# Altium PCB Lens-Maker.PcbDoc
Units mil, origin at the board's own origin, x right, y up, seen from the top; angles counter-clockwise.
Board outline 3937.01 x 1968.5 mil, 6 copper layers (L1-TOP-SGN-GND, L2-GND, L3-SGN-GND, Layer 1, Layer 2, Bottom Layer), stack 60.748 mil thick; 110 components, 94 nets, 427 pads, 16 vias.
Unrouted connection lines stored in the file: 291.
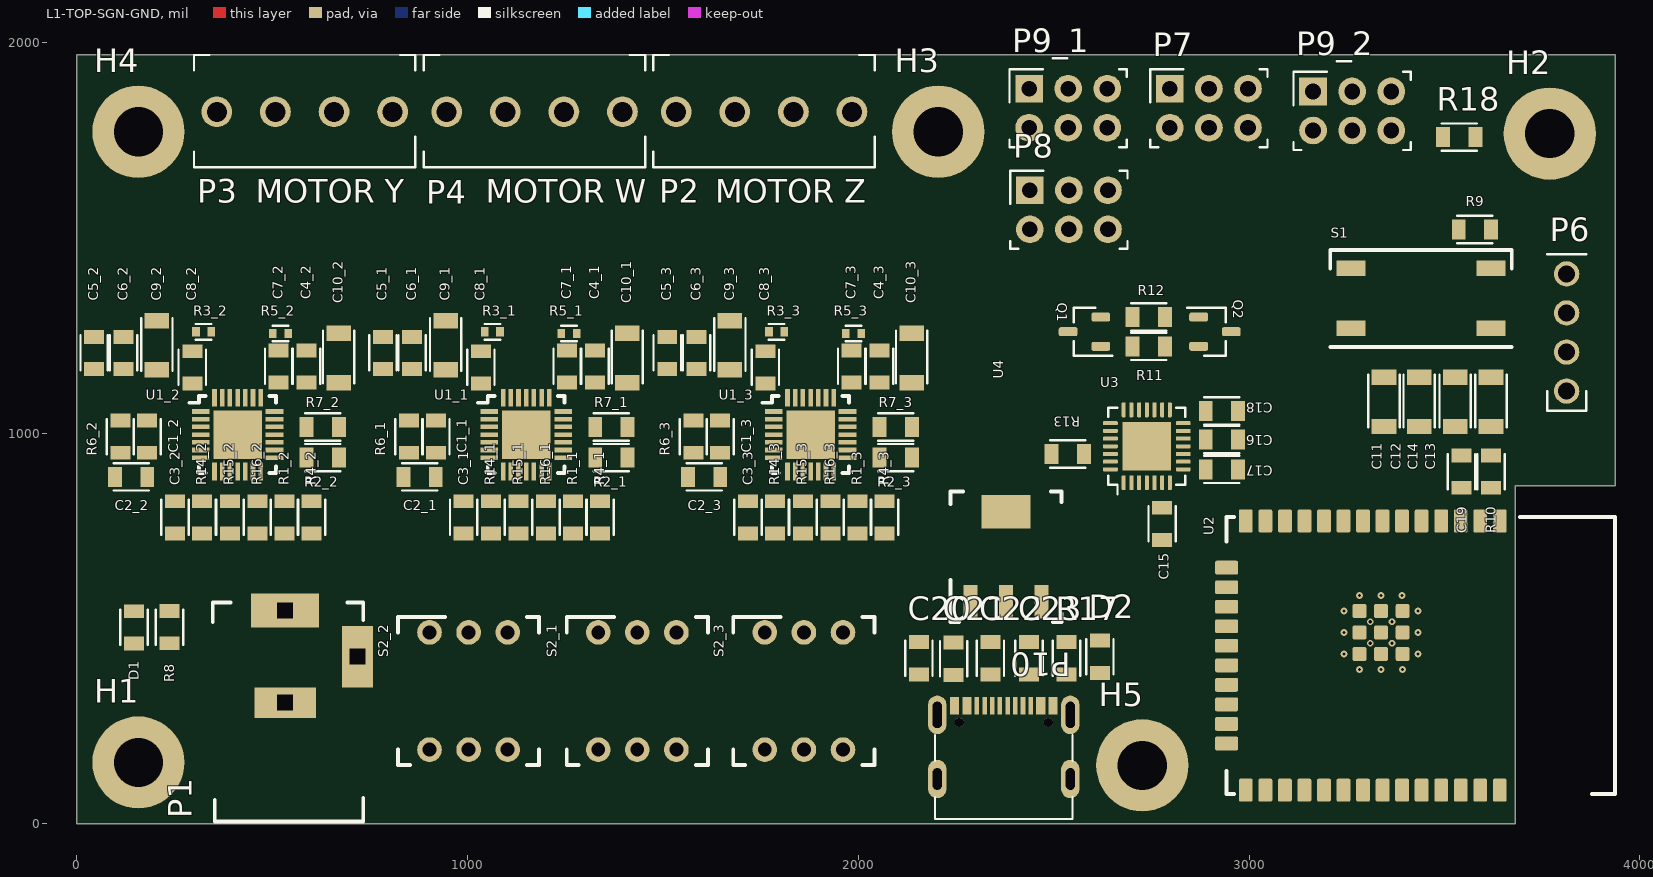
[diagram p0: L1-TOP-SGN-GND view]
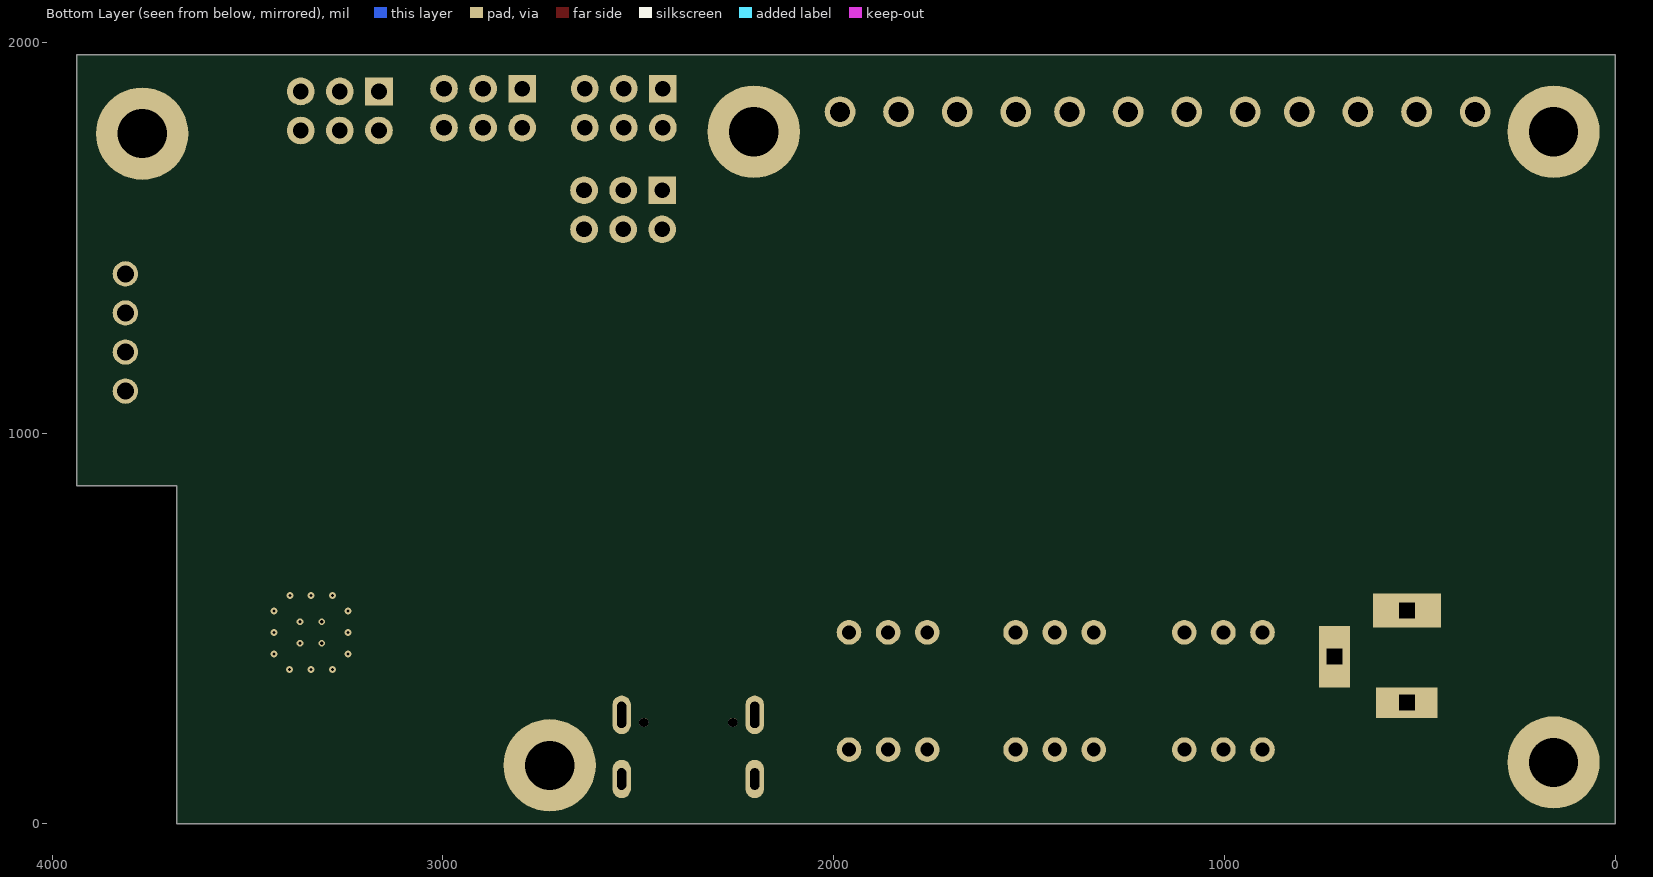
[diagram p1: Bottom Layer view, seen from below]

## Layer stack, top to bottom
Top Solder: solder mask 0.8, Solder Resist, Dk 3.8
L1-TOP-SGN-GND: signal copper 1.378
Dielectric 1: prepreg 3.913, Prepreg 3313x1, Dk 4.05
L2-GND: signal copper 0.689
Dielectric 2: core 21.654, Core, Dk 4.6
L3-SGN-GND: signal copper 0.598
Dielectric 3: prepreg 4.284, Prepreg 2116x1, Dk 4.25
Layer 1: signal copper 0.598
Dielectric 4: core 21.654, Core, Dk 4.6
Layer 2: signal copper 0.689
Dielectric 5: prepreg 3.913, Prepreg 3313x1, Dk 4.05
Bottom Layer: signal copper 1.378
Board Layer Stack Bottom Solder: solder mask 0.8, Solder Resist, Dk 3.8

## Board outline
0,0 3681.1,0 3681.1,866.14 3937.01,866.14 3937.01,1968.5 0,1968.5

## Design rules (kind name [scope] priority, off if disabled: settings)
Clearance Clearance_Tracks [IsTrack vs IsTrack] p1: gap=3.54 ignorepadtopadclearanceinfootprint=FALSE
Clearance PadToTrack_Clearance [IsPad vs IsTrack] p2: gap=7.87 ignorepadtopadclearanceinfootprint=FALSE
Clearance ViaToTrack_Clearance [IsVia vs IsTrack] p3: gap=10 ignorepadtopadclearanceinfootprint=FALSE
Clearance PadToPad_Clearance [IsPad] p4: gap=5 ignorepadtopadclearanceinfootprint=FALSE
Clearance ViaToVia_Clearance [IsVia] p5: gap=10 ignorepadtopadclearanceinfootprint=FALSE
Clearance Clearance_General [All] p6: gap=10 ignorepadtopadclearanceinfootprint=FALSE
DiffPairsRouting DiffPairsRouting_USB [InDifferentialPairClass('USBDIFF')] p1: maxlimit=10 minlimit=6 mostfreqgap=10 toplayer_maxgap=6 toplayer_prefgap=6 toplayer_minwidth=6 toplayer_maxwidth=6 toplayer_prefwidth=6 bottomlayer_maxgap=6 bottomlayer_prefgap=6 bottomlayer_minwidth=6 bottomlayer_maxwidth=6 bottomlayer_prefwidth=6 impedanceprofiledriven=TRUE impedanceprofileid={743CC166-8A05-4D0D-BD32-40FB75AD64E1} impedanceprofilevalue=90.000000 maxuncoupledlength=500
HoleSize [All] p1: absolutevalues=TRUE maxlimit=248.03 minlimit=7.87 maxpercent=80.000 minpercent=20.000
HoleToHoleClearance [All] p1: gap=19.68 allowstackedmicrovias=TRUE
MinimumAnnularRing [All] p1: minimumring=7.87
PolygonConnect PolygonConnect_THT [All] p1: thpad.connectstyle=Relief thpad.reliefconductorwidth=10 thpad.reliefentries=4 thpad.polygonreliefangle="45 Angle" thpad.airgapwidth=12 smdpad.connectstyle=Direct smdpad.reliefconductorwidth=10 smdpad.reliefentries=4 smdpad.polygonreliefangle="45 Angle" smdpad.airgapwidth=12 via.connectstyle=Direct via.reliefconductorwidth=10 via.reliefentries=4 via.polygonreliefangle="45 Angle" via.airgapwidth=12
RoutingVias [All] p1: holewidth=11.81 width=17.72 viastyle="Through Hole" minholewidth=11.81 minwidth=15.75 maxholewidth=11.81 maxwidth=17.72
SilkToSolderMaskClearance [IsPad] p1: minsilkscreentomaskgap=5.91 clearancetoexposedcopper=TRUE
SolderMaskExpansion [All] p1: expansion=4 istentingtop=FALSE
UnRoutedNet [All] p1: checkbadconnections=TRUE
Width [All] p1: maxlimit=40 minlimit=3.54 preferedwidth=10 toplayer_maxwidth=39.37 bottomlayer_maxwidth=39.37 minimp=50.000000 maximp=50.000000 favimp=50.000000
25 further rules are at their usual default settings.

## Classes and differential pairs
component class U_Mechanical_Holes: H1 H2 H3 H4 H5 R18
differential pair class USBDIFF: D
channel class GPIO_Header: U_GPIO_Header1 U_GPIO_Header2
channel class A4988: U_A49881 U_A49882 U_A49883
component class U_USB_Connector: P10
component class U_Stepper_Driver: D1 P1 P2 P3 P4 R8
component class U_SPI_Header: P7
component class U_Power: C20 C21 C22 C23 D2 R17 U4
component class U_I2C_Header: P8
component class U_GPIO_Header2: P9_2
component class U_GPIO_Header1: P9_1
component class U_ESP32_Block: C11 C12 C13 C14 C15 C16 C17 C18 C19 P6 Q1 Q2 R9 R10 R11 R12 R13 S1 tga U2 U3
component class U_A49883: C1_3 C2_3 C3_3 C4_3 C5_3 C6_3 C7_3 C8_3 C9_3 C10_3 R1_3 R2_3 R3_3 R4_3 R5_3 R6_3 R7_3 R14_3 R15_3 R16_3 S2_3 U1_3
component class U_A49882: C1_2 C2_2 C3_2 C4_2 C5_2 C6_2 C7_2 C8_2 C9_2 C10_2 R1_2 R2_2 R3_2 R4_2 R5_2 R6_2 R7_2 R14_2 R15_2 R16_2 S2_2 U1_2
component class U_A49881: C1_1 C2_1 C3_1 C4_1 C5_1 C6_1 C7_1 C8_1 C9_1 C10_1 R1_1 R2_1 R3_1 R4_1 R5_1 R6_1 R7_1 R14_1 R15_1 R16_1 S2_1 U1_1
differential pair D: +D_P -D_N

## Components (designator, comment, footprint, x,y, rotation, side; value= is the part's Value field where it differs from the comment)
C1_1 "CAP" 0805 918.62,991.49 r90 top value=100nF (schematic designator C1)
C1_2 "CAP" 0805 179.9,991.49 r90 top value=100nF (schematic designator C1)
C1_3 "CAP" 0805 1646.48,991.49 r90 top value=100nF (schematic designator C1)
C2_1 "CAP" 0805 877.29,888.49 r0 top value=100nF (schematic designator C2)
C2_2 "CAP" 0805 138.56,888.49 r0 top value=100nF (schematic designator C2)
C2_3 "CAP" 0805 1605.14,888.49 r0 top value=100nF (schematic designator C2)
C3_1 "CAP" 0805 989.99,784.74 r90 top value=220nF (schematic designator C3)
C3_2 "CAP" 0805 251.27,784.74 r90 top value=220nF (schematic designator C3)
C3_3 "CAP" 0805 1717.85,784.74 r90 top value=220nF (schematic designator C3)
C4_1 "CAP" 0805 1326.62,1171 r270 top value=100nF (schematic designator C4)
C4_2 "CAP" 0805 587.9,1171 r270 top value=100nF (schematic designator C4)
C4_3 "CAP" 0805 2054.48,1171 r270 top value=100nF (schematic designator C4)
C5_1 "CAP" 0805 783.15,1205.54 r270 top value=100nF (schematic designator C5)
C5_2 "CAP" 0805 44.43,1205.54 r270 top value=100nF (schematic designator C5)
C5_3 "CAP" 0805 1511.01,1205.54 r270 top value=100nF (schematic designator C5)
C6_1 "CAP" 0805 858.15,1205.54 r90 top value=4.7uF (schematic designator C6)
C6_2 "CAP" 0805 119.43,1205.54 r90 top value=4.7uF (schematic designator C6)
C6_3 "CAP" 0805 1586.01,1205.54 r90 top value=4.7uF (schematic designator C6)
C7_1 "CAP" 0805 1254.99,1171 r90 top value=4.7uF (schematic designator C7)
C7_2 "CAP" 0805 516.27,1171 r90 top value=4.7uF (schematic designator C7)
C7_3 "CAP" 0805 1982.85,1171 r90 top value=4.7uF (schematic designator C7)
C8_1 "CAP" 0805 1033.99,1168.83 r90 top value=47uF (schematic designator C8)
C8_2 "CAP" 0805 295.27,1168.83 r90 top value=47uF (schematic designator C8)
C8_3 "CAP" 0805 1761.85,1168.83 r90 top value=47uF (schematic designator C8)
C9_1 "CAP" 1206 943.61,1225.16 r90 top value=47uF (schematic designator C9)
C9_2 "CAP" 1206 204.88,1225.16 r90 top value=47uF (schematic designator C9)
C9_3 "CAP" 1206 1671.46,1225.16 r90 top value=47uF (schematic designator C9)
C10_1 "CAP" 1206 1408.62,1192.65 r90 top value=47uF (schematic designator C10)
C10_2 "CAP" 1206 669.9,1192.65 r90 top value=47uF (schematic designator C10)
C10_3 "CAP" 1206 2136.48,1192.65 r90 top value=47uF (schematic designator C10)
C11 "CAP" 1206 3345.37,1080.3 r90 top value=47uF
C12 "CAP" 1206 3435.37,1080.3 r90 top value=47uF
C13 "CAP" 1206 3527.37,1080.3 r90 top value=47uF
C14 "CAP" 1206 3619.37,1080.3 r90 top value=47uF
C15 "CAP" 0805 2777.74,768.11 r90 top value=1uF
C16 "CAP" 0805 2930.79,983.7 r180 top value=100nF
C17 "CAP" 0805 2930.79,907.72 r0 top value=4.7uF
C18 "CAP" 0805 2930.79,1057.32 r0 top value=4.7uF
C19 "CAP" 0805 3543.55,901.77 r90 top value=1uF
C20 "CAP" 0805 2155,424.34 r90 top value=4.7uF
C21 "CAP" 0805 2244,423 r90 top value=4.7uF
C22 "CAP" 0805 2338,424.34 r90 top value=4.7uF
C23 "CAP" 0805 2437,424.34 r90 top value=4.7uF
D1 "LED" 0805 146,503 r270 top
D2 "LED" 0805 2618,428 r270 top
H1 "HOLE" HOLE_M3 157.48,157.48 r0 top
H2 "HOLE" HOLE_M3 3770,1767 r0 top
H3 "HOLE" HOLE_M3 2204.72,1771.65 r0 top
H4 "HOLE" HOLE_M3 157.48,1771.65 r0 top
H5 "HOLE" HOLE_M3 2727,150 r0 top
P1 "DC-005 2.0" "DC-005 2.0" 532.84,546.74 r90 top
P2 "MOTOR Z" WJ124-3.81-4P 1983.84,1822.69 r180 top
P3 "MOTOR Y" WJ124-3.81-4P 808.09,1822.69 r180 top
P4 "MOTOR W" WJ124-3.81-4P 1396.43,1822.69 r180 top
P6 "PZ254V-11-04P" PZ254V-11-04P 3813,1258 r90 top
P7 "HEADER 6POS" "HEADER 3X2" 2797.42,1782 r0 top
P8 "HEADER 6POS" "HEADER 3X2" 2439,1522 r0 top
P9_1 "HEADER 6POS" "HEADER 3X2" 2437.14,1782 r0 top (schematic designator P9)
P9_2 "HEADER 6POS" "HEADER 3X2" 3164,1775 r0 top (schematic designator P9)
P10 "TYPE-C-31-M-12" TYPE-C-31-M-12 2372.35,208.71 r0 top
Q1 "S8050" SOT-23-3 2578.87,1263.94 r270 top
Q2 "S8050" SOT-23-3 2912.87,1256.07 r90 top
R1_1 "RES" 0805 1270.05,784.74 r90 top value=10K (schematic designator R1)
R1_2 "RES" 0805 531.32,784.74 r90 top value=10K (schematic designator R1)
R1_3 "RES" 0805 1997.91,784.74 r90 top value=10K (schematic designator R1)
R2_1 "RES" 0805 1367.96,937.49 r180 top value=0R (schematic designator R2)
R2_2 "RES" 0805 629.24,937.49 r180 top value=0R (schematic designator R2)
R2_3 "RES" 0805 2095.82,937.49 r180 top value=0R (schematic designator R2)
R3_1 "RES" 0402 1063.31,1259.66 r0 top value=50m (schematic designator R3)
R3_2 "RES" 0402 324.58,1259.66 r0 top value=50m (schematic designator R3)
R3_3 "RES" 0402 1791.17,1259.66 r0 top value=50m (schematic designator R3)
R4_1 "RES" 0805 1339.05,784.74 r90 top value=100K (schematic designator R4)
R4_2 "RES" 0805 600.32,784.74 r90 top value=100K (schematic designator R4)
R4_3 "RES" 0805 2066.91,784.74 r90 top value=100K (schematic designator R4)
R5_1 "RES" 0402 1259.68,1255.64 r180 top value=50m (schematic designator R5)
R5_2 "RES" 0402 520.95,1255.64 r180 top value=50m (schematic designator R5)
R5_3 "RES" 0402 1987.54,1255.64 r180 top value=50m (schematic designator R5)
R6_1 "RES" 0805 849.99,991.49 r270 top value=100K (schematic designator R6)
R6_2 "RES" 0805 111.27,991.49 r270 top value=100K (schematic designator R6)
R6_3 "RES" 0805 1577.85,991.49 r270 top value=100K (schematic designator R6)
R7_1 "RES" 0805 1367.96,1016.34 r0 top value=100K (schematic designator R7)
R7_2 "RES" 0805 629.24,1016.34 r0 top value=100K (schematic designator R7)
R7_3 "RES" 0805 2095.82,1016.34 r0 top value=100K (schematic designator R7)
R8 "RES" 0805 237,504 r270 top value=1K6
R9 "RES" 0805 3578.03,1521.36 r0 top value=12K
R10 "RES" 0805 3619.37,901.77 r90 top value=0R
R11 "RES" 0805 2743.26,1222.6 r180 top value=12K
R12 "RES" 0805 2743.26,1297.41 r0 top value=12K
R13 "RES" 0805 2535.96,947.09 r0 top value=470R
R14_1 "RES" 0805 1059.31,784.74 r90 top value=10K (schematic designator R14)
R14_2 "RES" 0805 320.58,784.74 r90 top value=10K (schematic designator R14)
R14_3 "RES" 0805 1787.17,784.74 r90 top value=10K (schematic designator R14)
R15_1 "RES" 0805 1130.31,784.74 r90 top value=10K (schematic designator R15)
R15_2 "RES" 0805 391.58,784.74 r90 top value=10K (schematic designator R15)
R15_3 "RES" 0805 1858.17,784.74 r90 top value=10K (schematic designator R15)
R16_1 "RES" 0805 1200.68,784.74 r90 top value=10K (schematic designator R16)
R16_2 "RES" 0805 461.95,784.74 r90 top value=10K (schematic designator R16)
R16_3 "RES" 0805 1928.54,784.74 r90 top value=10K (schematic designator R16)
R17 "RES" 0805 2533,424.34 r270 top value=330R
R18 "RES" 0805 3538,1758 r180 top value=5.1M
S1 "PUSHBUTTON" PUSHBUTTON 3440.24,1345.36 r0 top
S2_1 "DIP SWITCH 3POS" C99420 1434.4,340.34 r0 top (schematic designator S2)
S2_2 "DIP SWITCH 3POS" C99420 1002.51,340.34 r0 top (schematic designator S2)
S2_3 "DIP SWITCH 3POS" C99420 1860.74,340.34 r0 top (schematic designator S2)
U1_1 "A4988" 28-QFN 1149.99,996.66 r0 top (schematic designator U1)
U1_2 "A4988" 28-QFN 411.27,996.66 r0 top (schematic designator U1)
U1_3 "A4988" 28-QFN 1877.85,996.66 r0 top (schematic designator U1)
U2 "ESP32-WROOM-32E" ESP32-WROOM-32E 3292.21,431.06 r270 top
U3 "CP2102" CP2102N 2738.37,966.77 r90 top
U4 "AMS1117-3.3V" SOT230P700X180-4N 2378,684 r90 top

## Footprints (in the part's own frame and the unit in brackets; to place one, negate y for a bottom-side part, rotate by r counter-clockwise, add the part's x,y. Pads: shape width x height; smd on the part's side, far side on the other; paste and mask are expansions set on the pad)
28-QFN [mm]
  rect 1.15x0.3 smd mask+0.2: 1(-2.4,1.5) 2(-2.4,1) 3(-2.4,0.5) 4(-2.4,0) 5(-2.4,-0.5) 6(-2.4,-1) 7(-2.4,-1.5) 15(2.4,-1.5) 16(2.4,-1) 17(2.4,-0.5) 18(2.4,0) 19(2.4,0.5) 20(2.4,1) 21(2.4,1.5)
  rect 0.3x1.15 smd mask+0.2: 8(-1.5,-2.4) 9(-1,-2.4) 10(-0.5,-2.4) 11(0,-2.4) 12(0.5,-2.4) 13(1,-2.4) 14(1.5,-2.4) 22(1.5,2.4) 23(1,2.4) 24(0.5,2.4) 25(0,2.4) 26(-0.5,2.4) 27(-1,2.4) 28(-1.5,2.4)
  rect 3.15x3.15 smd mask+0.2: 29(0,0)
  silkscreen extent -3.14,-2.5 2.5,2.5, body extent -2.5,-2.5 2.5,2.5, height 0.87
0402 [mm]
  rect 0.5x0.6 smd: 1(-0.5,0) 2(0.5,0)
  silkscreen extent -0.51,-0.51 0.51,0.51, body extent -0.5,-0.25 0.5,0.25, height 0.4
0805 [mm]
  rect 0.9x1.3 smd: 1(-1.05,0) 2(1.05,0)
  silkscreen extent -1.14,-0.89 1.14,0.89, body extent -1,-0.63 1,0.63, height 0.58
1206 [mm]
  rect 1x1.6 smd: 1(-1.6,0) 2(1.6,0)
  silkscreen extent -1.65,-1.02 1.78,1.02, body extent -1.52,-0.8 1.52,0.8, height 0.56
C99420 [mm]
  round 1.6 hole 0.9: 1(-2.54,3.81) 2(0,3.81) 3(2.54,3.81) 4(-2.54,-3.81) 5(0,-3.81) 6(2.54,-3.81)
  silkscreen extent -4.59,-4.81 4.59,4.81, body extent -4.59,-4.81 4.59,4.81, height 5.3
CP2102N [mm]
  rrect50% 0.97x0.26 smd: 1(-2.37,1.5) 2(-2.37,1) 3(-2.37,0.5) 4(-2.37,0) 5(-2.37,-0.5) 6(-2.37,-1) 7(-2.37,-1.5) 15(2.37,-1.5) 16(2.37,-1) 17(2.37,-0.5) 18(2.37,0) 19(2.37,0.5) 20(2.37,1) 21(2.37,1.5)
  rrect50% 0.26x0.97 smd: 8(-1.5,-2.37) 9(-1,-2.37) 10(-0.5,-2.37) 11(0,-2.37) 12(0.5,-2.37) 13(1,-2.37) 14(1.5,-2.37) 22(1.5,2.37) 23(1,2.37) 24(0.5,2.37) 25(0,2.37) 26(-0.5,2.37) 27(-1,2.37) 28(-1.5,2.37)
  rect 3.15x3.15 smd paste-0.585: 29(0,0)
  silkscreen extent -3.11,-2.5 2.5,2.5, body extent -2.5,-2.5 2.5,2.5, height 1
"DC-005 2.0" [mm]
  rect 4x2 hole 1 square: 2(-3,-4.7)
  rect 2x4 hole 1 square: 3(-6,0)
  rect 2.2x4.4 hole 1 square: 4(0,0)
  silkscreen extent -13.72,-5.08 0.51,4.7, body extent -13.62,-4.9 0.38,4.5, height 11.01
ESP32-WROOM-32E [mm]
  rrect25% 1.5x0.9 smd: 1(-8.75,8.88) 2(-8.75,7.61) 3(-8.75,6.34) 4(-8.75,5.07) 5(-8.75,3.8) 6(-8.75,2.53) 7(-8.75,1.26) 8(-8.75,-0.01) 9(-8.75,-1.28) 10(-8.75,-2.55) 11(-8.75,-3.82) 12(-8.75,-5.09) 13(-8.75,-6.36) 14(-8.75,-7.63) 25(8.75,-7.63) 26(8.75,-6.36) 27(8.75,-5.09) 28(8.75,-3.82) 29(8.75,-2.55) 30(8.75,-1.28) 31(8.75,-0.01) 32(8.75,1.26) 33(8.75,2.53) 34(8.75,3.8) 35(8.75,5.07) 36(8.75,6.34) 37(8.75,7.61) 38(8.75,8.88)
  rrect25% 0.9x1.5 smd: 15(-5.715,-8.88) 16(-4.445,-8.88) 17(-3.175,-8.88) 18(-1.905,-8.88) 19(-0.635,-8.88) 20(0.635,-8.88) 21(1.905,-8.88) 22(3.175,-8.88) 23(4.445,-8.88) 24(5.715,-8.88)
  rrect25% 0.9x0.9 smd: 39(-2.9,1.16) 39(-2.9,2.56) 39(-2.9,-0.24) 39(-1.5,2.56) 39(-1.5,1.16) 39(-1.5,-0.24) 39(-0.1,2.56) 39(-0.1,1.16) 39(-0.1,-0.24)
  silkscreen extent -9,-8.88 9,16.37, body extent -9,-9.13 9,16.37, height 3.2
"HEADER 3X2" [mm]
  rect 1.8x1.8 hole 1.02: 1(0,2.54)
  round 1.8 hole 1.02: 2(0,0) 3(2.54,2.54) 4(2.54,0) 5(5.08,2.54) 6(5.08,0)
  silkscreen extent -1.27,-1.27 6.35,3.81, body extent -1.27,-1.14 6.35,3.68, height 8.38
HOLE_M3 [mm]
  round 6 hole 3.2: 1(0,0)
PUSHBUTTON [mm]
  rect 1.9x1 smd: 1(-4.55,1.95) 1(4.55,1.95) 2(-4.55,-1.95) 2(4.55,-1.95)
  silkscreen extent -5.9,-3.15 5.9,3.15, body extent -5,-3 5,3, height 5.1
PZ254V-11-04P [mm]
  round 1.65 hole 1.1: 1(-3.81,0) 2(-1.27,0) 3(1.27,0) 4(3.81,0)
  silkscreen extent -5.08,-1.27 5.08,1.27, body extent -5.08,-1.27 5.08,1.27, height 7.27
SOT230P700X180-4N [mm] "SOT223, 4-Leads, Body 6.50x7.00mm (avg), Pitch 2.30mm, IPC Medium Density"
  rect 2.15x0.9 smd: 1(-2.925,2.3) 2(-2.925,0) 3(-2.925,-2.3)
  rect 2.15x3.2 smd: 4(2.925,0)
  silkscreen extent -4.25,-3.6 4.25,3.6, body extent -1.85,-3.35 1.85,3.35, height 1.8
SOT-23-3 [mm]
  rrect50% 0.59x1.23 smd: 1(1.05,1.06) 2(-0.85,1.06) 3(0.1,-1.06)
  silkscreen extent -1.46,-0.7 1.66,1.8, body extent -1.36,-1.17 1.56,1.17, height 1.12
TYPE-C-31-M-12 [mm]
  rect 0.6x1.14 smd mask+0.05: A1/B12(-3.2,2.375) A4/B9(-2.4,2.375) B1/A12(3.2,2.375) B4/A9(2.4,2.375)
  rect 0.3x1.14 smd mask+0.05: A5(-1.25,2.375) A6(-0.25,2.375) A7(0.25,2.375) A8(1.25,2.375) B5(1.75,2.375) B6(0.75,2.375) B7(-0.75,2.375) B8(-1.75,2.375)
  oval 1.2x2.5 hole 0.6 slot 1.7 at 90 deg mask+0: S1(-4.325,1.795) S2(4.325,1.795)
  oval 1.2x2.5 hole 0.6 slot 1.4 at 90 deg mask+0: S3(-4.325,-2.375) S4(4.325,-2.375)
  round 0.6 hole 0.6 unplated: ""(-2.89,1.305) ""(2.89,1.305)
  silkscreen extent -4.47,-4.97 4.47,0.48, body extent -4.47,-4.97 4.47,2.93, height 3.31
WJ124-3.81-4P [mm]
  round 2 hole 1.3: 1(0,0) 2(3.81,0) 3(7.62,0) 4(11.43,0)
  silkscreen extent -1.48,-3.7 12.91,3.6, body extent -1.48,-3.7 12.91,3.6, height 8.6

## Part data
C1_1 C1_2 C1_3 C2_1 C2_2 C2_3 C4_1 C4_2 C4_3 C5_1 C5_2 C5_3 C16: "SMD Capacitor", Manufacturer=YAGEO, Manufacturer Part Number=CC0805KRX7R9BB104, Supplier Part Number=C49678, Supplier=JLCPCB
C3_1 C3_2 C3_3: "SMD Capacitor", Manufacturer="Samsung Electro-Mechanics", Manufacturer Part Number=CL21B224KBFNNNE, Supplier Part Number=C5378, Supplier=JLCPCB
C6_1 C6_2 C6_3 C7_1 C7_2 C7_3 C17 C18 C20 C21 C22 C23: "SMD Capacitor", Manufacturer="Samwha Capacitor", Manufacturer Part Number=CS2012X7R475K350NRE, Supplier Part Number=C560882, Supplier=JLCPCB
C8_1 C8_2 C8_3 C9_1 C9_2 C9_3 C10_1 C10_2 C10_3 C11 C12 C13 C14: "SMD Capacitor", Manufacturer=TDK, Manufacturer Part Number=C3216X5R1E476MTJ00E, Supplier Part Number=C76659, Supplier=JLCPCB
C15 C19: "SMD Capacitor", Manufacturer="Samsung Electro-Mechanics", Manufacturer Part Number=CL21B105KBFNNNE, Supplier Part Number=C28323, Supplier=JLCPCB
D1 D2: "0805 Light Emitting Diodes (LED) ROHS", Manufacturer="Hubei KENTO Elec", Manufacturer Part Number=C2297, Supplier=JLCPCB, Supplier Part Number=C2297
P1: "Shrouded DC Power Receptacle 2mm 6.4mm Plugin AC/DC Power Connectors ROHS", Manufacturer="BOOMELE(Boom Precision Elec)", Supplier Part Number=C16214, Manufacturer Part Number="DC-005 2.0", Supplier=JLCPCB
P2 P3 P4: library part "BORNERA SR-4", Manufacturer="Ningbo Kangnex Elec", Manufacturer Part Number=WJ124-3.81-4P, Supplier Part Number=C69809, Supplier=JLCPCB
P6: "Straight Square Pins 2.5mm 6mm -40℃~+105℃ 1 3mm 4 2.54mm Black Brass 1x4P Straight,P=2.54mm  Pin Headers ROHS", Manufacturer=XFCN, Supplier Part Number=C492403, Manufacturer Part Number=PZ254V-11-04P, Supplier=JLCPCB
P7 P8 P9_1 P9_2: "Straight 2 6 2.54mm Black Straight,P=2.54mm  Pin Headers ROHS", Manufacturer="BOOMELE(Boom Precision Elec)", Manufacturer Part Number=C65114, Supplier=JLCPCB, Supplier Part Number=C65114
P10: "USB C SMD Connector", Manufacturer="Korean Hroparts Elec", Supplier Part Number=C165948, Manufacturer Part Number=TYPE-C-31-M-12, Supplier=JLCPCB
Q1 Q2: Manufacturer=JSMSEMI, Supplier Part Number=C916390, Manufacturer Part Number=S8050, Supplier=JLCPCB
R1_1 R1_2 R1_3 R14_1 R14_2 R14_3 R15_1 R15_2 R15_3 R16_1 R16_2 R16_3: "SMD Resistor", Manufacturer="UNI-ROYAL(Uniroyal Elec)", Manufacturer Part Number=0805W8F1002T5E, Supplier Part Number=C17414, Supplier=JLCPCB
R2_1 R2_2 R2_3 R10: "SMD Resistor", Manufacturer="UNI-ROYAL(Uniroyal Elec)", Manufacturer Part Number=0805W8F0000T5E, Supplier Part Number=C17477, Supplier=JLCPCB
R3_1 R3_2 R3_3 R5_1 R5_2 R5_3: "SMD Resistor", Manufacturer=PANASONIC, Manufacturer Part Number=ERJ2BWFR050X, Supplier Part Number=C412880, Supplier=JLCPCB
R4_1 R4_2 R4_3 R6_1 R6_2 R6_3 R7_1 R7_2 R7_3: "SMD Resistor", Manufacturer="FH (Guangdong Fenghua Advanced Tech)", Manufacturer Part Number=RS-05K104JT, Supplier Part Number=C118844, Supplier=JLCPCB
  R7_1 R7_2 R7_3: Comments=DNP
R8: "SMD Resistor", Manufacturer=Resistor.Today, Manufacturer Part Number=AECR0805F1K60K9, Supplier Part Number=C352253, Supplier=JLCPCB
R9 R11 R12: "SMD Resistor", Manufacturer="LIZ Elec", Manufacturer Part Number=CR0805J80123G, Supplier Part Number=C101937, Supplier=JLCPCB
R13: "SMD Resistor", Manufacturer="UNI-ROYAL(Uniroyal Elec)", Manufacturer Part Number=0805W8F4700T5E, Supplier Part Number=C17710, Supplier=JLCPCB
R17: "SMD Resistor", Manufacturer="UNI-ROYAL(Uniroyal Elec)", Manufacturer Part Number=0805W8F3300T5E, Supplier Part Number=C17630, Supplier=JLCPCB
R18: "SMD Resistor", Manufacturer="TA-I Tech", Manufacturer Part Number=RM10FTN5104, Supplier Part Number=C156163, Supplier=JLCPCB
S1: "NO 6mm Gull Wing 4.3mm Black Round Button Brick nogging SPST 6mm 180gf@±30gf SMD  Tactile Switches ROHS", Manufacturer=Yuandi, Manufacturer Part Number=TS-1095PS-A1B2-C3D2, Supplier Part Number=C2834918, Supplier=JLCPCB
S2_1 S2_2 S2_3: "SPST Red Flat dial, raised type 2.54mm 3 DIP  DIP Switches ROHS", Manufacturer="Dongguan Guangzhu Industrial", Manufacturer Part Number=C99420, Supplier=JLCPCB, Supplier Part Number=C99420
U1_1 U1_2 U1_3: "IC MTR DRVR BIPOLAR 3-5.5V 28QFN", Manufacturer="Allegro MicroSystems", Manufacturer Part Number=A4988SETTR-T, Supplier Part Number=620-1343-1-ND, Supplier=Digikey
U2: "RX TXRX MOD WIFI TRACE ANT SMD", Manufacturer="Espressif Systems", Manufacturer Part Number=ESP32-WROOM-32E-N4, Supplier Part Number=1965-ESP32-WROOM-32E-N4CT-ND, Supplier=Digikey
U3: "QFN-28 USB ICs ROHS", Manufacturer="SILICON LABS", Manufacturer Part Number=CP2102N-A02-GQFN28R, Supplier Part Number=C964632, Supplier=JLCPCB
U4: "75dB@(10kHz) 800mA 1.5V@(700mA) Fixed 3.3V~3.3V Positive 1 12V SOT-223  Linear Voltage Regulators (LDO) ROHS", Manufacturer="Shenzhen Fuman Elec", Supplier Part Number=C173386, Manufacturer Part Number=AMS1117-3.3V, Supplier=JLCPCB

## Via types
v1: diameter 17.72, hole 7.87, L1-TOP-SGN-GND to Bottom Layer, 16 vias

## Nets (pads, with @x,y where several pads share a name; then routed paths per layer and width w, separated by ;. In a path a pad name is that pad's centre, name@x,y a point inside that pad or via, vN(x,y) a via of type N, cw(c..) or ccw(c..) an arc to the next point about the centre after c; other vN are vias at no path point)
1A_1: P4.1 U1_1.24
1A_2: P3.1 U1_2.24
1A_3: P2.1 U1_3.24
1B_1: P4.2 U1_1.21
1B_2: P3.2 U1_2.21
1B_3: P2.2 U1_3.21
2A_1: P4.3 U1_1.26
2A_2: P3.3 U1_2.26
2A_3: P2.3 U1_3.26
2B_1: P4.4 U1_1.1
2B_2: P3.4 U1_2.1
2B_3: P2.4 U1_3.1
3V3: C2_1.1 C2_2.1 C2_3.1 C11.1 C12.1 C13.1 C14.1 C22.1 C23.1 D2.1 P7.1 P8.1 P8.3 P9_1.1 P9_2.1 R2_1.1 R2_2.1 R2_3.1 R4_1.1 R4_2.1 R4_3.1 R9.1 S2_1.4 S2_1.5 S2_1.6 S2_2.4 S2_2.5 S2_2.6 S2_3.4 S2_3.5 S2_3.6 U1_1.15 U1_2.15 U1_3.15 U2.2 U4.2 U4.4
CHASSIS: H1.1 H2.1 H3.1 H4.1 H5.1 P10.S1 P10.S2 P10.S3 P10.S4 R18.1
CS: P7.6 U2.29
D_N: P10.A7 U3.5
D_P: P10.A6 U3.4
DIR_1: U1_1.19 U2.9
DIR_2: U1_2.19 U2.11
DIR_3: U1_3.19 U2.7
DTR: Q2.2 R11.1 U3.28
E\N\_1: R6_1.1 U1_1.2
E\N\_2: R6_2.1 U1_2.2
E\N\_3: R6_3.1 U1_3.2
EN: C19.2 Q1.3 R10.2 S1.2 U2.3
GND: C3_1.1 C3_2.1 C3_3.1 C4_1.1 C4_2.1 C4_3.1 C5_1.1 C5_2.1 C5_3.1 C6_1.2 C6_2.2 C6_3.2 C7_1.2 C7_2.2 C7_3.2 C8_1.2 C8_2.2 C8_3.2 C9_1.2 C9_2.2 C9_3.2 C10_1.2 C10_2.2 C10_3.2 C11.2 C12.2 C13.2 C14.2 C15.1 C16.1 C17.2 C18.2 C19.1 C20.2 C21.2 C22.2 C23.2 P1.2 P1.3 P7.2 P8.2 P8.4 P9_1.2 P9_2.2 P10.A1/B12 P10.B1/A12 R1_1.1 R1_2.1 R1_3.1 R3_1.1 R3_2.1 R3_3.1 R5_1.1 R5_2.1 R5_3.1 R6_1.2 R6_2.2 R6_3.2 R7_1.2 R7_2.2 R7_3.2 R8.1 R10.1 R14_1.1 R14_2.1 R14_3.1 R15_1.1 R15_2.1 R15_3.1 R16_1.1 R16_2.1 R16_3.1 R17.1 R18.2 U1_1.3 U1_1.18 U1_1.29 U1_2.3 U1_2.18 U1_2.29 U1_3.3 U1_3.18 U1_3.29 U2.1 U2.15 U2.38 U2.39 U3.3 U3.29 U4.1
IN1_1: P9_1.3 U2.4
IN1_2: P9_2.3 Q2.3 U2.25
IN2_1: P9_1.4 U2.12
IN2_2: P9_2.4 U2.27
IN3_1: P9_1.5 U2.24
IN3_2: P9_2.5 U2.28
IN4_1: P9_1.6 U2.26
IN4_2: P9_2.6 U2.5
IO18: P7.3 U2.30
IO19: P7.4 U2.31
IO21: P8.5 U2.33
IO22: P8.6 U2.36
IO23: P7.5 U2.37
IO25: U1_2.16 U2.10
IO32: U1_1.16 U2.8
IO34: U1_3.16 U2.6
MS1_1: R14_1.2 S2_1.1 U1_1.9
MS1_2: R14_2.2 S2_2.1 U1_2.9
MS1_3: R14_3.2 S2_3.1 U1_3.9
MS2_1: R15_1.2 S2_1.2 U1_1.10
MS2_2: R15_2.2 S2_2.2 U1_2.10
MS2_3: R15_3.2 S2_3.2 U1_3.10
MS3_1: R16_1.2 S2_1.3 U1_1.11
MS3_2: R16_2.2 S2_2.3 U1_2.11
MS3_3: R16_3.2 S2_3.3 U1_3.11
MTCK: P6.3 U2.16
MTDI: P6.2 U2.14
MTDO: P6.4 U2.23
MTMS: P6.1 U2.13
NetC1_1_1: C1_1.1 U1_1.5
NetC1_1_2: C1_1.2 U1_1.4
NetC1_2_1: C1_2.1 U1_2.5
NetC1_2_2: C1_2.2 U1_2.4
NetC1_3_1: C1_3.1 U1_3.5
NetC1_3_2: C1_3.2 U1_3.4
NetC2_1_2: C2_1.2 U1_1.6
NetC2_2_2: C2_2.2 U1_2.6
NetC2_3_2: C2_3.2 U1_3.6
NetC3_1_2: C3_1.2 U1_1.8
NetC3_2_2: C3_2.2 U1_2.8
NetC3_3_2: C3_3.2 U1_3.8
NetC15_2: C15.2 U3.6
NetD1_2: D1.2 R8.2
NetD2_2: D2.2 R17.2
NetQ1_1: Q1.1 R11.2
NetQ2_1: Q2.1 R12.2
NetR1_1_2: R1_1.2 U1_1.13
NetR1_2_2: R1_2.2 U1_2.13
NetR1_3_2: R1_3.2 U1_3.13
NetR2_1_2: R2_1.2 R7_1.1 U1_1.17
NetR2_2_2: R2_2.2 R7_2.1 U1_2.17
NetR2_3_2: R2_3.2 R7_3.1 U1_3.17
NetR9_2: R9.2 S1.1
NetR13_1: R13.1 U2.34
R\S\T\_1: R4_1.2 U1_1.12 U1_1.14
R\S\T\_2: R4_2.2 U1_2.12 U1_2.14
R\S\T\_3: R4_3.2 U1_3.12 U1_3.14
RTS: Q1.2 R12.1 U3.24
SENSE1_1: R5_1.2 U1_1.23
SENSE1_2: R5_2.2 U1_2.23
SENSE1_3: R5_3.2 U1_3.23
SENSE2_1: R3_1.2 U1_1.27
SENSE2_2: R3_2.2 U1_2.27
SENSE2_3: R3_3.2 U1_3.27
U0RX: R13.2 U3.26
U0TX: U2.35 U3.25
V_MOT: C4_1.2 C4_2.2 C4_3.2 C5_1.2 C5_2.2 C5_3.2 C6_1.1 C6_2.1 C6_3.1 C7_1.1 C7_2.1 C7_3.1 C8_1.1 C8_2.1 C8_3.1 C9_1.1 C9_2.1 C9_3.1 C10_1.1 C10_2.1 C10_3.1 D1.1 P1.4 U1_1.22 U1_1.28 U1_2.22 U1_2.28 U1_3.22 U1_3.28
VBUS: C16.2 C17.1 C18.1 C20.1 C21.1 P10.A4/B9 P10.B4/A9 U3.7 U3.8 U4.3
pads on no net: P10. P10.A5 P10.A8 P10.B5 P10.B6 P10.B7 P10.B8 U1_1.7 U1_1.20 U1_1.25 U1_2.7 U1_2.20 U1_2.25 U1_3.7 U1_3.20 U1_3.25 U2.17 U2.18 U2.19 U2.20 U2.21 U2.22 U2.32 U3.1 U3.2 U3.9 U3.10 U3.11 U3.12 U3.13 U3.14 U3.15 U3.16 U3.17 U3.18 U3.19 U3.20 U3.21 U3.22 U3.23 U3.27
copper on no net:
  other v1: 3282.76,395.63 3337.88,395.63 3393,395.63 3243.39,435 3432.37,435 3310.32,462.56 3365.44,462.56 3243.39,490.12 3432.37,490.12 3310.32,517.68 3365.44,517.68 3243.39,545.24 3432.37,545.24 3282.76,584.61 3337.88,584.61 3391.82,584.61